# Altium PCB DS18B20_Industry_V2.PcbDoc
Units mm, origin at the board's own origin, x right, y up, seen from the top; angles counter-clockwise.
Board outline 151.25 x 83.25 mm, 2 copper layers (Top Layer, Bottom Layer); 77 components, 60 nets, 244 pads, 110 vias.
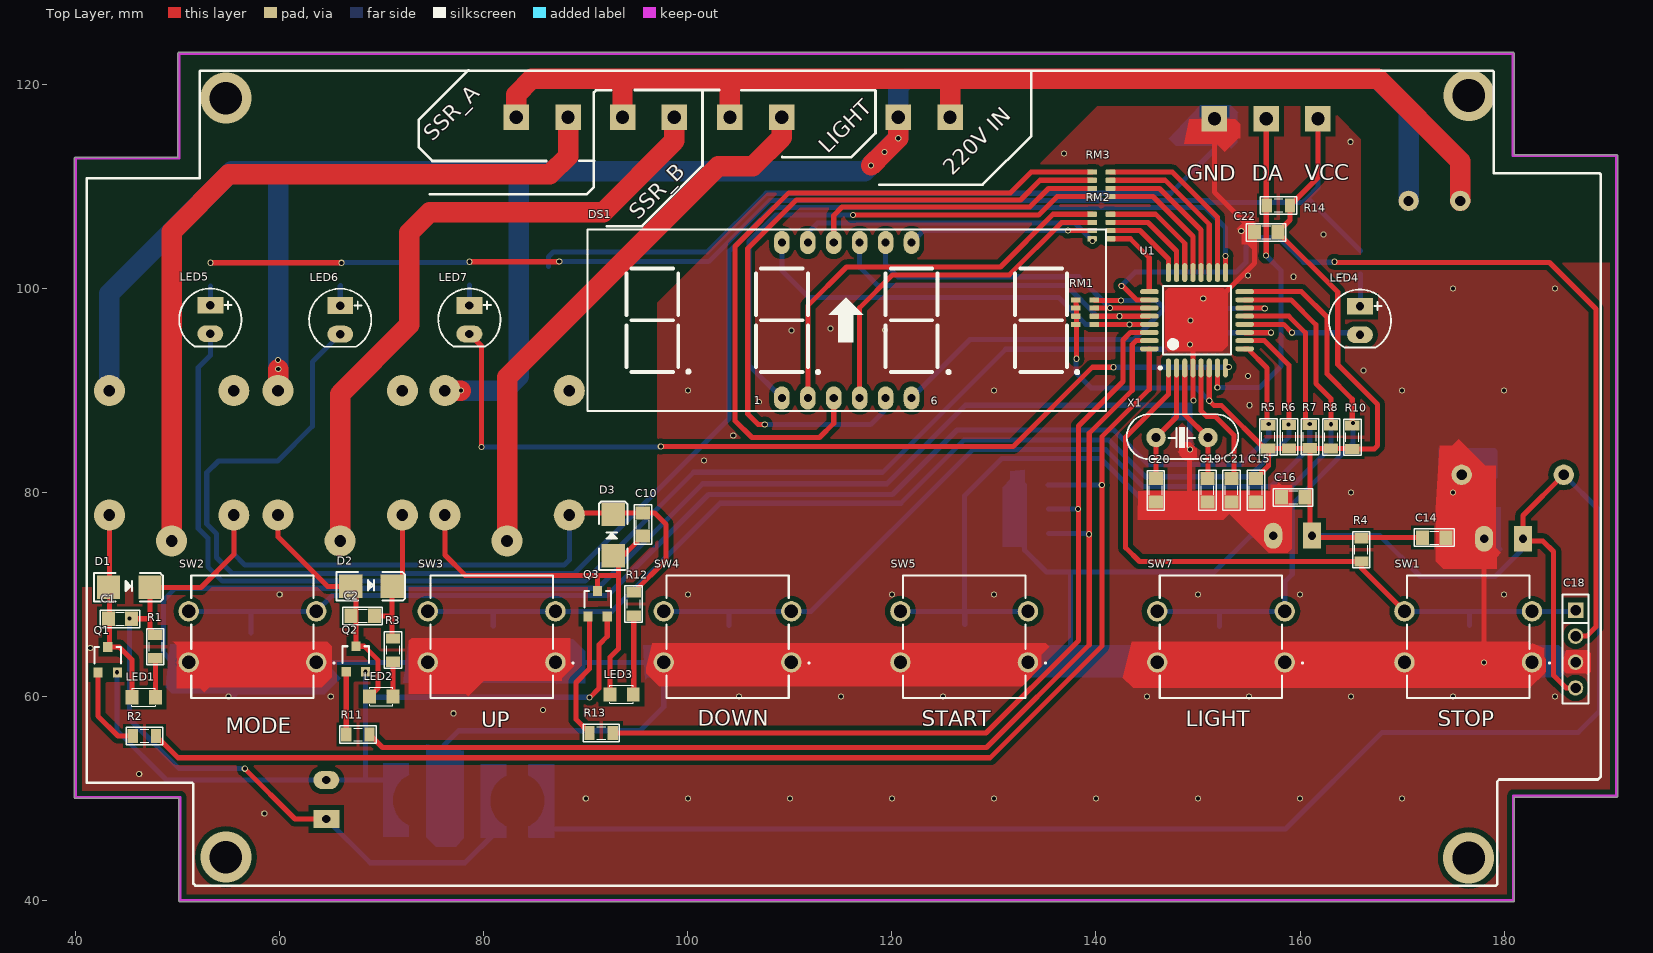
[diagram p0: Top Layer view]
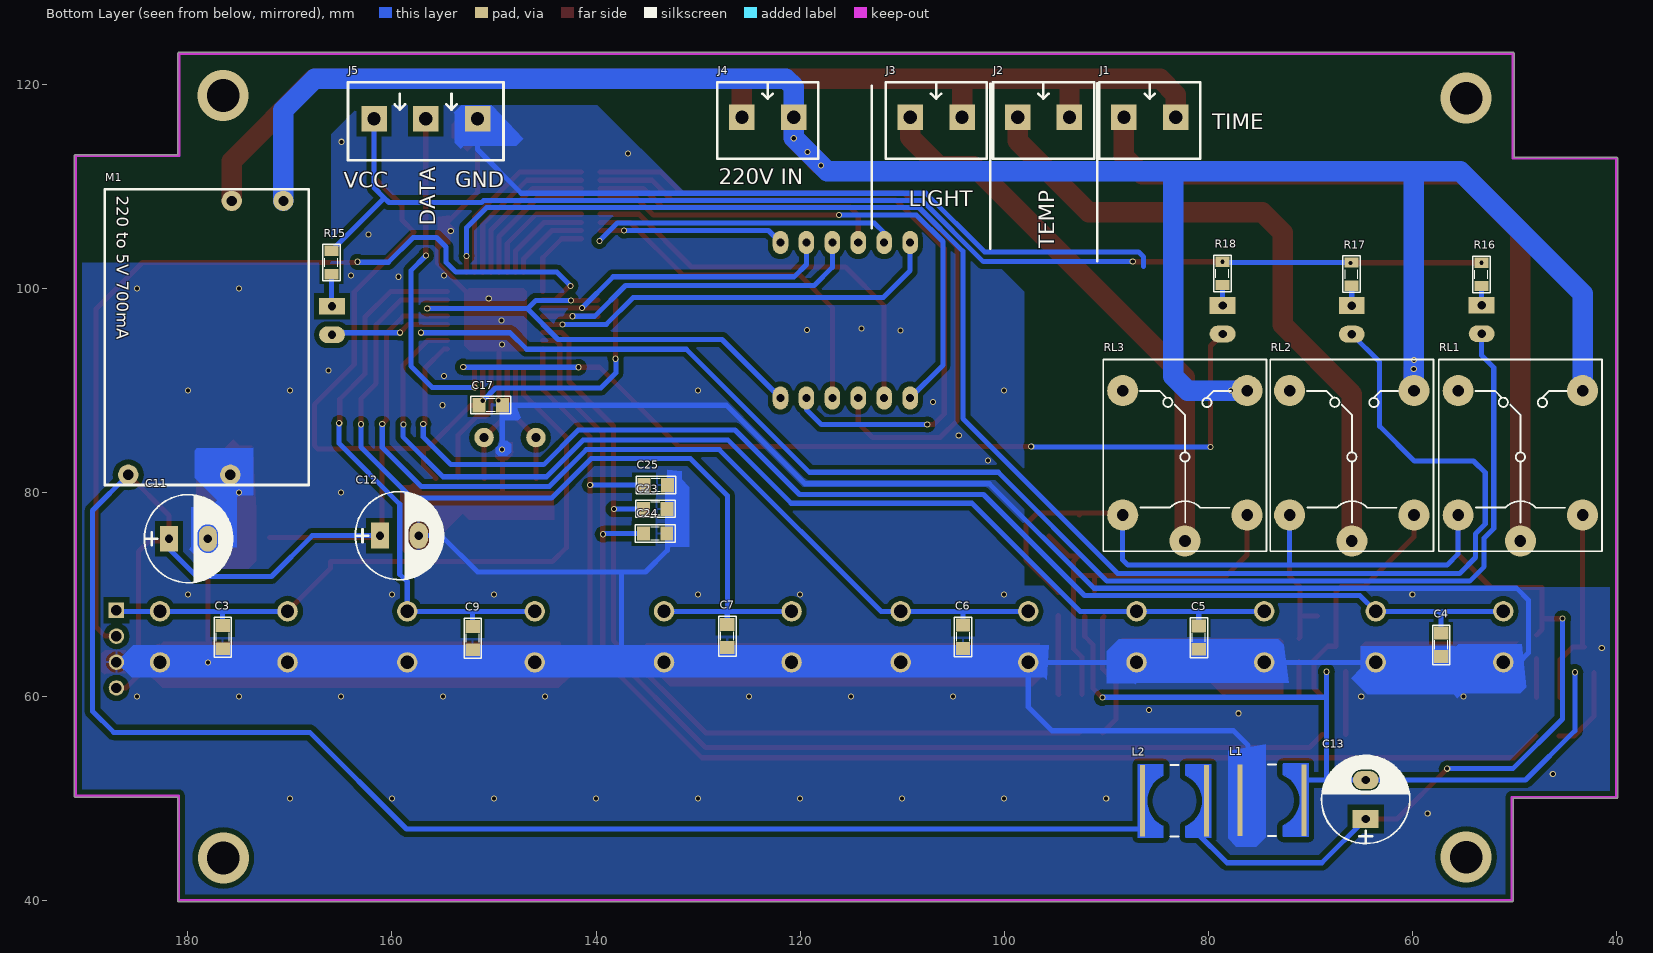
[diagram p1: Bottom Layer view, seen from below]

## Layer stack, top to bottom
Top Solder: solder mask 0.0102, Solder Resist, Dk 3.5
Top Layer: signal copper 0.0356
Dielectric 1: dielectric 0.32, FR-4, Dk 4.8
Bottom Layer: signal copper 0.0356
Bottom Solder: solder mask 0.0102, Solder Resist, Dk 3.5

## Board outline
50.105,40 50.105,50 40,50 cw(c40,50.127) 39.873,50.127 39.873,112.728 cw(c40,112.728) 40,112.855 50.02,112.855 50.02,123 cw(c50.147,123) 50.147,123.127 180.848,123.127 cw(c180.848,123) 180.975,123 cw(c180.848,123) 180.975,122.987 cw(c180.848,122.973) 180.975,122.973 180.975,113.1 190.975,113.1 cw(c190.975,112.973) 190.987,113.1 cw(c191,112.973) 191.127,112.973 191.127,50.242 cw(c191,50.242) 190.942,50.129 190.941,50.129 cw(c190.883,50.242) 190.883,50.115 181.01,50.115 181.01,40 cw(c180.883,40) 180.883,39.873 50.232,39.873 cw(c50.232,40)

## Design rules (kind name [scope] priority, off if disabled: settings)
Clearance [All] p1: gap=0.2 ignorepadtopadclearanceinfootprint=FALSE
PolygonConnect [All] p1: connectstyle=Relief reliefconductorwidth=0.254 reliefentries=4 polygonreliefangle="90 Angle" airgapwidth=0.254
RoutingVias [All] p1: holewidth=0.4 width=0.6 viastyle="Through Hole" minholewidth=0.4 minwidth=0.6 maxholewidth=0.4 maxwidth=0.6
SolderMaskExpansion [All] p1: expansion=0.102
Width [All] p1: maxlimit=2 minlimit=0.35 preferedwidth=0.5
30 further rules are at their usual default settings.

## Components (designator, comment, footprint, x,y, rotation, side; value= is the part's Value field where it differs from the comment)
C1 "104" SM-0805 44.35,67.62 r0 top value=103
C2 "104" SM-0805 68.13,67.9 r0 top value=103
C3 "104" SM-0805 176.59,65.82 r90 bottom value=103
C4 "104" SM-0805 57.17,65.06 r90 bottom value=103
C5 "104" SM-0805 80.93,65.77 r90 bottom value=103
C6 "104" SM-0805 104.03,65.84 r90 bottom value=103
C7 "104" SM-0805 127.14,65.92 r90 bottom value=103
C9 "104" SM-0805 152.09,65.72 r90 bottom value=103
C10 "104" SM-0805 95.59,76.85 r90 top value=103
C11 "1000uF/16V" CP1.5/3.4 181.85,75.46 r180 bottom
C12 "1000uF/16V" CP1.5/3.4 161.18,75.76 r180 bottom
C13 "1000uF/16V" CP1.5/3.4 64.57,48 r90 bottom
C14 "104" SM-0805 173.14,75.56 r180 top value=103
C15 "104" SM-0805 155.67,80.22 r90 top value=103
C16 "104" SM-0805 159.32,79.52 r0 top value=103
C17 "104" SM-0805 150.33,88.54 r0 bottom value=103
C18 "JP4" JP4-C1T 187,68.45 r270 top
C19 "22P" SM-0805 150.93,80.22 r90 top value=103
C20 "22P" SM-0805 145.85,80.2 r90 top value=103
C21 "104" SM-0805 153.28,80.22 r90 top value=103
C22 "104" SM-0805 156.677,105.5 r0 top value=103
C23 "104" SM-0805 134.19,78.38 r0 bottom value=103
C24 "104" SM-0805 134.21,75.96 r0 bottom value=103
C25 "104" SM-0805 134.15,80.71 r0 bottom value=103
D1 "Diode" DIO-SMD-106 45.25,70.69 r180 top
D2 "Diode" DIO-SMD-106 68.992,70.78 r180 top
D3 "Diode" DIO-SMD-106 92.68,75.812 r270 top
DS1 "7SEGQ" 7SEGQ 109.22,89.25 r0 top locked value="LED 7Q SEG"
J1 "KF2" KF2-5.08 85.72,116.762 r180 bottom
J2 "KF2" KF2-5.08 96.14,116.762 r180 bottom
J3 "KF2" KF2-5.08 106.66,116.762 r180 bottom
J4 "KF2" KF2-5.08 123.16,116.762 r180 bottom
J5 "KF3" KF3-5.08 151.61,116.61 r0 bottom
L1 "1.5uH" "BOURNS SRR6028" 73.75,49.83 r180 bottom
L2 "1.5uH" "BOURNS SRR6028" 83.3,49.77 r180 bottom
LED1 "LED" SM-LED-0805-Blue 47.81,59.91 r180 top
LED2 "LED" SM-LED-0805-Blue 71.1,60 r180 top
LED3 "LED" SM-LED-0805-Blue 94.65,60.2 r180 top
LED4 "LED" LED-5-BLUE 165.87,96.84 r270 top
LED5 "LED" LED-5-BLUE 53.2,96.937 r270 top
LED6 "LED" LED-5-BLUE 65.93,96.907 r270 top
LED7 "LED" LED-5-BLUE 78.59,96.927 r270 top
M1 "220-5VDC" "5V 700mA 3.5W AC DC" 188.14,109.72 r270 bottom
Q1 "2SC1815" SOT23-321 43.15,63.6 r0 top value=C1815
Q2 "2SC1815" SOT23-321 67.47,63.67 r0 top value=C1815
Q3 "2SC1815" SOT23-321 91.15,69.08 r0 top value=C1815
R1 "10k" RES-SMD-0805 47.81,64.88 r270 top
R2 "10k" RES-SMD-0805 46.747,56.13 r0 top
R3 "10k" RES-SMD-0805 71.11,64.55 r270 top
R4 "10k" RES-SMD-0805 166.01,74.37 r270 top
R5 "10k" RES-SMD-0805 156.89,85.44 r90 top
R6 "10k" RES-SMD-0805 158.92,85.45 r90 top
R7 "10k" RES-SMD-0805 160.96,85.463 r90 top
R8 "10k" RES-SMD-0805 163.04,85.43 r90 top
R10 "10k" RES-SMD-0805 165.12,85.4 r90 top
R11 "10k" RES-SMD-0805 67.67,56.27 r0 top
R12 "10k" RES-SMD-0805 94.7,69.06 r270 top
R13 "10k" RES-SMD-0805 91.507,56.42 r0 top
R14 "1k" RES-SMD-0805 157.88,108.12 r0 top
R15 "10k" RES-SMD-0805 165.93,102.53 r90 bottom
R16 "10k" RES-SMD-0805 53.22,101.36 r90 bottom
R17 "10k" RES-SMD-0805 65.96,101.39 r90 bottom
R18 "10k" RES-SMD-0805 78.61,101.46 r90 bottom
RL1 "Relay 10A/12V" RL_SPDT_10A 49.406,75.238 r90 bottom value="Relay SPDT, 10A, 12V"
RL2 "Relay 10A/12V" RL_SPDT_10A 65.924,75.24 r90 bottom value="Relay SPDT, 10A, 12V"
RL3 "Relay 10A/12V" RL_SPDT_10A 82.284,75.238 r90 bottom value="Relay SPDT, 10A, 12V"
RM1 "1k" RN4-0805 138.93,97.66 r180 top
RM2 "1k" RN4-0805 140.52,106.06 r180 top
RM3 "1k" RN4-0805 140.52,110.19 r180 top
SW1 "Tact Switch" SW4_12x12 182.83,72.063 r180 top value="Button chip 4 pin"
SW2 "Tact Switch" SW4_12x12 63.68,72.063 r180 top value="Button chip 4 pin"
SW3 "Tact Switch" SW4_12x12 87.12,72.063 r180 top value="Button chip 4 pin"
SW4 "Tact Switch" SW4_12x12 110.24,72.063 r180 top value="Button chip 4 pin"
SW5 "Tact Switch" SW4_12x12 133.43,72.063 r180 top value="Button chip 4 pin"
SW7 "Tact Switch" SW4_12x12 158.6,72.063 r180 top value="Button chip 4 pin"
U1 "STM8S003K3T6C" LQFP32T30 149.9,96.87 r90 top
X1 "12Mhz" XT2 148.43,85.37 r0 top value=4Mhz

## Footprints (in the part's own frame and the unit in brackets; to place one, negate y for a bottom-side part, rotate by r counter-clockwise, add the part's x,y. Pads: shape width x height; smd on the part's side, far side on the other; paste and mask are expansions set on the pad)
"5V 700mA 3.5W AC DC" [mm]
  round 2 hole 1: 1(1.15,17.5) 2(1.15,12.44) 3(28,2.3) 4(28,12.3)
  silkscreen extent 0,0 29,20
7SEGQ [mil] "DIP 12 Leads; Body 48 x 20 mm; Pitch 0.5 mm"
  oval 60x90 hole 31: 1(0,0) 2(100,0) 3(200,0) 4(300,0) 5(400,0) 6(500,0) 7(500,600) 8(400,600) 9(300,600) 10(200,600) 11(100,600) 12(0,600)
  silkscreen extent -750,-50 1250,650, body extent -720,-80 1260,668, height 565
"BOURNS SRR6028" [mm] "Precision Wire Wound Inductor, 2-Leads, Body 6.80x6.80mm, IPC Medium Density"
  rect 0.5x7 smd: 1(-3.15,0) 2(3.15,0)
  Top Layer region: 3.6,3.6 1.1,3.6 1.1,2.5 1.4,2.4 1.7,2.1 1.9,2 2.1,1.7 2.3,1.4 2.5,1 2.6,0.7 2.7,0.3 2.7,0 3.6,0
  Top Layer region: 3.6,-3.6 1.1,-3.6 1.1,-2.5 1.4,-2.4 1.7,-2.1 1.9,-2 2.1,-1.7 2.3,-1.4 2.5,-1 2.6,-0.7 2.7,-0.3 2.7,0 3.6,0
  Top Layer region: -3.6,-3.6 -1.1,-3.6 -1.1,-2.5 -1.4,-2.4 -1.7,-2.1 -1.9,-2 -2.1,-1.7 -2.3,-1.4 -2.5,-1 -2.6,-0.7 -2.7,-0.3 -2.7,0 -3.6,0
  Top Layer region: -3.6,3.6 -1.1,3.6 -1.1,2.5 -1.4,2.4 -1.7,2.1 -1.9,2 -2.1,1.7 -2.3,1.4 -2.5,1 -2.6,0.7 -2.7,0.3 -2.7,0 -3.6,0
  Top Layer lines w0.1: 1.1,-3.55 1.1,-2.5 ccw(c0,0) 2.731,0 ccw(c0,0) 1.1,2.5 1.1,3.55 ; -1.1,-3.55 -1.1,-2.5 cw(c0,0) -2.731,0 cw(c0,0) -1.1,2.5 -1.1,3.55
  silkscreen extent -0.4,-3.5 0.4,3.5, body extent -3.4,-3.4 3.4,3.4, height 2.8
CP1.5/3.4 [mil] "Tu hoa 220->470uF,16V, 470uF/16V,25V"
  rect 70x100 hole 32: 1(0,0)
  oval 70x100 hole 32: 2(150,0)
  silkscreen extent -95,-170 245,170, body extent -85,-157 230,157, height 446
DIO-SMD-106 [mil]
  rect 90x90.55 smd: 1(80,0) 2(-80,0)
  silkscreen extent -130,-55 135,55, body extent -99,-50 106,52, height 95
JP4-C1T [mm] "4 row, straight, gold plating"
  rect 1.52x1.52 hole 1.02: 1(0,0)
  round 1.52 hole 1.02: 2(2.54,0) 3(5.08,0) 4(7.62,0)
  silkscreen extent -1.52,-1.27 9.14,1.27, body extent -1.52,-1.25 9.14,1.25, height 8.51
KF2-5.08 [mm]
  rect 2.5x2.5 hole 1.3: 1(-2.54,0) 2(2.54,0)
  silkscreen extent -4.95,-4.08 4.95,3.43, body extent -5,-4.07 5,3.43, height 10
KF3-5.08 [mm]
  rect 2.5x2.5 hole 1.3: 1(0,0) 2(5.08,0) 3(10.147,0)
  silkscreen extent -2.54,-3.58 12.7,4.06, body extent -2.42,-3.51 12.58,3.99, height 10
LED-5-BLUE [mil] "LED 2 PIN, 5 ly , Only colour, pin to pin 110mil"
  rect 65x100 hole 32: 1(-55,0)
  oval 65x100 hole 32: 2(55,0)
  silkscreen extent -120,-120 104,120, body extent -113,-120 100,117, height 339
LQFP32T30 [mm] "32 7 x 7mm 0.8mm (31.5mil)"
  oval 1.85x0.5 smd: 1(-4.675,2.8) 2(-4.675,2) 3(-4.675,1.2) 4(-4.675,0.4) 5(-4.675,-0.4) 6(-4.675,-1.2) 7(-4.675,-2) 8(-4.675,-2.8) 17(4.675,-2.8) 18(4.675,-2) 19(4.675,-1.2) 20(4.675,-0.4) 21(4.675,0.4) 22(4.675,1.2) 23(4.675,2) 24(4.675,2.8)
  oval 0.5x1.85 smd: 9(-2.8,-4.675) 10(-2,-4.675) 11(-1.2,-4.675) 12(-0.4,-4.675) 13(0.4,-4.675) 14(1.2,-4.675) 15(2,-4.675) 16(2.8,-4.675) 25(2.8,4.675) 26(2,4.675) 27(1.2,4.675) 28(0.4,4.675) 29(-0.4,4.675) 30(-1.2,4.675) 31(-2,4.675) 32(-2.8,4.675)
  silkscreen extent -4.8,-3.35 3.35,3.72, body extent -3.5,-3.5 3.5,3.5, height 1.6
RES-SMD-0805 [mil]
  rect 39.37x55 smd: 1(-45,0) 2(45,0)
  silkscreen extent -70,-34 70,33, body extent -39,-25 39,25, height 31
RL_SPDT_10A [mil] "Relay SPDT, 5 pin, 10A,W 650mil, L 800mil, H 800mil"
  round 120 hole 45: 1(0,0) 2(580,240) 3(580,-240) 4(100,-240) 5(100,240)
  silkscreen extent -40,-315 700,315, body extent -46,-304 706,306, height 602
RN4-0805 [mm]
  round 0.254 on Mech15: 0(0,0)
  rrect25% 0.95x0.5 smd: 1(-0.9,1.2) 2(-0.9,0.4) 3(-0.9,-0.4) 4(-0.9,-1.2) 5(0.9,-1.2) 6(0.9,-0.4) 7(0.9,0.4) 8(0.9,1.2)
  Top Layer pour cut-out: -0.4,1.7 0.4,1.7 0.4,-1.7 -0.4,-1.7
  body extent -0.87,-1.68 0.88,1.67, height 0.7
SM-0805 [mil] "Compoment SMD 80x50mil"
  rect 50x55 smd: 1(-45,0) 2(45,0)
  silkscreen extent -77,-34 76,33, body extent -40,-25 40,25, height 24
SM-LED-0805-Blue [mil]
  rect 50x55 smd: 1(0,0) 2(90,0)
  silkscreen extent 0,-35 90,35, body extent 5,-25 85,25, height 43
SOT23-321 [mm]
  rect 0.9x0.95 smd mask+0: 1(0.95,-1.25)
  rect 0.9x0.95 smd: 2(0,1.25) 3(-0.95,-1.25)
  silkscreen extent -1.3,-0.38 1.3,1.25, body extent -1.52,-1.23 1.48,1.27, height 1.06
SW4_12x12 [mm]
  round 2 hole 1.3: 1(0.1,8.723) 2(0.1,3.723) 3(12.6,3.723) 4(12.6,8.723)
  silkscreen extent -1.68,0.22 12.35,12.22, body extent -0.51,0.22 13.46,12.22, height 4.3
XT2 [mil] "Footpin for Crystal 2 pin"
  round 75 hole 34: 1(-100,0) 2(100,0)
  silkscreen extent -213,-83 217,90, body extent -216,-87 216,90, height 144

## Part data
C1 C2 C3 C4 C5 C6 C7 C9 C10 C14 C15 C16 C17 C19 C20 C21 C22 C23 C24 C25: library part CM, "Cap SMD"
C11 C12 C13: library part CP4, "Cap 1000uF/16V - 220uF/50V", Description 1="2200uF-3300uF/6,3V - 1000uF-2200uF/10V", Description 2="1000uF/16V - 470uF => 1000uF/25V - 100uF/100V", Description 3=330uF>470uF/35V_220uF>470uF/50V_10uF>22uF/250V, Description 4="220uF => 330uF/63V - 10uF =>33uF/160 - 200V", Description 5="4,7uF>10uF/250V_3,3uF>10uF/400V - 2,2uF>4,7uF/450V"
C18: "WR-PHD 2.54 mm Angled Socket Header", Manufacturer="W¨¹rth Elektronik eiSos GmbH", partNo=613004143121, ComponentLink1 Description=Manufacturer, ComponentLink1URL=http://www.we-online.com, ComponentLink2 Description=Datasheet, ComponentLink2URL=http://katalog.we-online.de/em/datasheet/6130xx143121.pdf, Created by="Karrer Zheng", Created Date="29 March 2013", NoPins=04
DS1: library part LED7Q, "Four 7 Seg Dipslay"
J1 J2 J3 J4: Manufacturer="Würth Elektronik eiSos GmbH", partNo=691103110002, ComponentLink1 Description=Manufacturer, ComponentLink1URL=http://www.we-online.com, ComponentLink2 Description=Datasheet, ComponentLink2URL=http://katalog.we-online.de/em/datasheet/6911031100xx.pdf, Created by="Karrer Zheng", Created Date="29 October 2013", NoPins=2
J5: Manufacturer="Würth Elektronik eiSos GmbH", partNo=691103110003, ComponentLink1 Description=Manufacturer, ComponentLink1URL=http://www.we-online.com, ComponentLink2 Description=Datasheet, ComponentLink2URL=http://katalog.we-online.de/em/datasheet/6911031100xx.pdf, Created by="Karrer Zheng", Created Date="29 October 2013", NoPins=3
L1 L2: library part Inductor, "SMT Inductor"
M1: library part "5V 700mA 3.5W AC 220 to DC"
Q1 Q2 Q3: "NPN 600mW, ECB", =C2383
R1 R2 R3 R4 R5 R6 R7 R8 R10 R11 R12 R13 R14 R15 R16 R17 R18: library part R, "Resistor R1/4W"
RL1 RL2 RL3: library part "Relay 1", "Relay SPDT,10A - 12VDC 5 Pin", ="Relay SPDT, 10A, 24V"
RM1 RM2 RM3: library part ResPack
SW1 SW2 SW3 SW4 SW5 SW7: library part SW4
X1: library part XT2, "Crystal, 32.768 KHz, -40 to 85 degC, 3.2 x 1.5 x 0.9 mm SMD"

## Via types
v1: diameter 0.6, hole 0.4, Top Layer to Bottom Layer, 106 vias
v2: diameter 5, hole 3.2, Top Layer to Bottom Layer, 4 vias

## Nets (pads, with @x,y where several pads share a name; then routed paths per layer and width w, separated by ;. In a path a pad name is that pad's centre, name@x,y a point inside that pad or via, vN(x,y) a via of type N, cw(c..) or ccw(c..) an arc to the next point about the centre after c; other vN are vias at no path point)
220AC_L: J4.2 M1.1 RL1.3 RL2.3 RL3.3 | length 217.3
  Top Layer w2: RL2.3 59.86,90.004 v1(59.86,92.08) ; RL3.3 v1(77.75,89.97) v1@77.77,89.95 ; v1(117.95,112.04) v1(119.26,113.35) v1(120.62,114.71) J4.2
  Bottom Layer w2: RL1.3 43.31,99.46 55.32,111.47 117.35,111.47 120.62,114.74 J4.2 120.62,119.78 121.39,120.55 167.55,120.55 170.64,117.46 M1.1 ; RL2.3 59.86,90.004 v1(59.86,92.08) 59.86,111.24 59.828,111.272 ; RL3.3 v1(77.75,89.97) 82,89.97 83.42,91.39 83.42,111.31
  other v1: 59.828,92.98
220AC_N: J1.2 J2.2 J3.2 J4.1 M1.2 | length 114.2
  Top Layer w2: J1.2 83.18,118.98 84.72,120.52 93.11,120.52 ; J2.2 93.6,120.03 93.11,120.52 ; J3.2 104.12,120.31 104.33,120.52 ; J4.1 125.7,120.52 ; M1.2 175.7,112.46 167.64,120.52 125.7,120.52 ; 93.11,120.52 104.33,120.52 ; 104.33,120.52 125.7,120.52
a: RM2.1 U1.25 | length 7.9
  Top Layer w0.5: RM2.1 143.36,104.86 145.225,102.995 U1.25
b: RM2.2 U1.24 | length 8.2
  Top Layer w0.5: RM2.2 144.31,105.66 147.1,102.87 U1.24
c: RM2.3 U1.23 | length 9.7
  Top Layer w0.5: RM2.3 145.09,106.46 147.9,103.65 U1.23
d: RM2.4 U1.22 | length 11.3
  Top Layer w0.5: RM2.4 145.85,107.26 148.7,104.41 U1.22
DOWN: C6.2 R7.2 SW4.2 SW4.3 U1.13 | length 92.4
  Top Layer w0.5: U1.13 158.9,97.27 160.52,95.65 160.52,87.14 R7.2@160.96,86.7
  Bottom Layer w0.5: SW4.3 104.15,68.34 ; C6.2 104.03,68.22 104.15,68.34 ; v1(160.95,86.7) 160.95,84.4 157.12,80.57 144.58,80.57 140.96,84.19 127.92,84.19 112.07,68.34 SW4.2 104.15,68.34
DS18B20: J5.2 R14.1 U1.7 | length 33.9
  Top Layer w0.5: v1(151.89,90.28) 151.9,90.29 U1.7 ; v1@156.69,103.21 J5.2
  Bottom Layer w0.5: v1(151.89,90.28) 156.05,90.28 158.15,92.38 158.15,101.72 v1(156.66,103.21)
e: RM3.1 U1.21 | length 13.2
  Top Layer w0.5: RM3.1 145.59,108.99 149.5,105.08 U1.21
f: RM3.2 U1.20 | length 14.7
  Top Layer w0.5: RM3.2 146.23,109.79 150.3,105.72 U1.20
g: RM3.3 U1.19 | length 16.2
  Top Layer w0.5: RM3.3 146.78,110.59 151.1,106.27 U1.19
GND: C3.1 C4.1 C5.1 C6.1 C7.1 C9.1 C11.2 C12.2 C14.1 C15.1 C16.1 C17.1 C18.3 C19.1 C20.1 C21.1 C22.1 C23.1 C24.1 C25.1 J5.1 L1.1 M1.4 SW1.1 SW1.4 SW2.1 SW2.4 SW3.1 SW3.4 SW4.1 SW4.4 SW5.1 SW5.4 SW7.1 SW7.4 U1.4 | length 481.6
  Top Layer w0.35: v1@104.37,85.53 104.41,85.53 v1(104.45,85.57) ; v1@110.17,95.78 v1(110.17,95.86)
  Top Layer w0.5: C20.1 145.87,79.077 C19.1 C21.1 C15.1 157.734,79.077 C16.1 ; 149.18,79.1 149.18,84.18 v1(149.21,84.21) ; v1(149.54,89.01) 149.5,89.05 U1.4 149.5,96.43 155.534,102.464 C22.1 151.61,109.424 J5.1 ; C14.1 174.383,75.46 175.89,75.46 ; M1.4 175.89,81.67 175.89,75.46 ; v1(178.02,63.32) 178.04,63.34 C11.2 175.89,75.46
  Bottom Layer w0.35: v1@77.03,58.23 v1(77.03,58.35) ; v1@154.88,91.23 v1(154.88,91.4)
  Bottom Layer w0.5: 76.09,52.28 76.09,55.21 77.52,56.64 95.32,56.64 97.64,58.96 SW4.4 ; C5.1 80.93,63.35 80.92,63.34 ; 86.33,102.12 86.33,103.06 86.82,103.55 101.91,103.55 107.68,109.32 147.33,109.32 151.61,113.6 J5.1 ; C6.1 104.03,63.35 104.04,63.34 ; C7.1 127.14,63.47 127.01,63.34 ; C25.1 133.007,74.333 135.15,72.19 137.49,72.19 ; v1@149.187,84.21 C17.1 127.21,88.54 119.52,80.85 101.45,80.85 91.2,70.6 49.77,70.6 48.6,69.43 48.6,64.28 49.54,63.34 SW2.4 SW2.1 SW3.4 80.92,63.34 ; C9.1 152.09,63.36 152.07,63.34 ; C12.2 155.16,75.76 151.59,72.19 137.49,72.19 ; C3.1 176.59,63.4 176.65,63.34 ; C18.3 186.97,63.34 SW1.1 176.65,63.34 ; 80.92,63.34 SW3.1 SW4.4 ; SW4.4 104.04,63.34 ; 104.04,63.34 SW4.1 SW5.4 127.01,63.34 ; 127.01,63.34 SW5.1 137.49,63.34 ; 137.49,63.34 SW7.4 152.07,63.34 ; 137.49,63.34 137.49,72.19 ; 152.07,63.34 SW1.4 176.65,63.34
  other v1: 58.49,48.52 90,50 100,50 110,50 120,50 130,50 140,50 150,50 160,50 170,50 46.23,52.39 85.79,58.68 55,60 65,60 105,60 115,60 125,60 145,60 155,60 165,60 175,60 185,60 41.43,64.76 60,70 100,70 120,70 130,70 150,70 160,70 180,70 165,80 175,80 101.6,83.12 155.05,88.54 106.96,88.86 100,90 130,90 170,90 180,90 166.21,91.95 149.23,94.5 119.33,95.9 113.98,96.07 149.27,96.83 150.51,99 175,100 185,100 159.35,101.13 154.9,101.24 164.03,101.27 162.31,105.28 154.24,105.61 136.87,113.21 164.95,114.36
GND_RELAY: C13.2 L1.2 Q1.1 Q2.1 Q3.1 | length 76.1
  Top Layer w0.5: v1(44.07,62.37) 44.09,62.35 Q1.1 ; v1(90.38,59.88) 91.279,60.779 91.279,61.085 91.31,61.116 91.31,65.1 92.1,65.89 Q3.1
  Bottom Layer w0.5: v1@44.08,62.36 v1(44.07,62.37) 44.07,56.63 48.9,51.8 61.5,51.8 68.37,51.8 ; v1(68.42,62.42) 68.42,59.75 ; 71.04,51.89 70.95,51.8 68.37,51.8 ; v1@90.38,59.92 68.59,59.92 68.42,59.75 ; 68.37,51.8 68.42,51.85 68.42,59.75
h: RM3.4 U1.18 | length 17.7
  Top Layer w0.5: RM3.4 147.48,111.39 151.9,106.97 U1.18
LED1: DS1.12 RM1.1 U1.29 | length 44.4
  Top Layer w0.5: RM1.1 139.84,96.47 v1(143.28,96.47) U1.29
  Bottom Layer w0.5: DS1.12 109.22,101.73 111.85,99.1 136.36,99.1 138.99,96.47 v1(143.28,96.47)
LED2: DS1.9 RM1.2 U1.28 | length 35.3
  Top Layer w0.5: RM1.2 v1(142.32,97.26) 145.215,97.26 U1.28
  Bottom Layer w0.5: DS1.9 116.84,102.06 118.62,100.28 137.11,100.28 140.13,97.26 v1(142.32,97.26)
LED3: DS1.8 RM1.3 U1.27 | length 31.3
  Top Layer w0.5: RM1.3 139.84,98.07 v1(141.37,98.07) U1.27
  Bottom Layer w0.5: DS1.8 119.38,102.33 120.58,101.13 138.31,101.13 v1(141.37,98.07)
LED4: DS1.6 RM1.4 U1.14 | length 47.4
  Top Layer w0.5: RM1.4 139.84,98.87 139.89,98.82 v1(142.46,98.82) ; U1.14 156.51,98.07 v1(156.54,98.04)
  Bottom Layer w0.5: DS1.6 127.66,94.99 143.72,94.99 146.72,97.99 145.89,98.82 v1(142.46,98.82) ; 146.77,98.04 v1(156.54,98.04)
LIGHT: C9.2 R10.2 SW7.2 SW7.3 U1.16 | length 55.8
  Top Layer w0.5: U1.16 160.14,99.67 162.63,97.18 162.63,91.62 165.12,89.13 R10.2@165.12,86.78
  Bottom Layer w0.5: SW7.3 151.93,68.34 ; C9.2 152.09,68.18 151.93,68.34 ; v1(165.17,86.78) 165.17,84.78 159.23,78.84 159.23,71.98 158.5,71.25 SW7.2 151.93,68.34
MODE: C4.2 R5.2 SW2.2 SW2.3 U1.9 | length 127.6
  Top Layer w0.5: U1.9 154.88,94.07 156.77,92.18 R5.2@156.77,86.703
  Bottom Layer w0.5: SW2.3 57.3,68.34 ; C4.2 57.17,68.21 57.3,68.34 ; v1(156.93,86.69) 156.93,85.44 154.21,82.72 145.13,82.72 141.74,86.11 126.37,86.11 120.06,79.8 102.03,79.8 92.13,69.9 65.14,69.9 SW2.2 57.3,68.34
NetC1_1: C1.1 D1.1 LED1.2 Q1.2 RL1.4 | length 19.6
  Top Layer w0.5: RL1.4 43.31,65.01 Q1.2 44.28,64.85 45.524,63.606 LED1.2
NetC2_1: C2.1 D2.1 LED2.2 Q2.2 RL2.4 | length 24
  Top Layer w0.5: RL2.4 59.828,75.652 64.7,70.78 D2.1 67.47,70.27 Q2.2 68.28,64.92 69.65,63.55 69.65,60.836 LED2.2
NetC10_1: C10.1 D3.1 LED3.2 Q3.2 RL3.4 | length 41.2
  Top Layer w0.5: RL3.4 76.188,73.862 78.18,71.87 91.14,71.87 ; Q3.2 91.15,71.86 91.14,71.87 ; LED3.2 92.364,63.844 93.2,64.68 93.2,71.86 ; C10.1 93.663,73.78 D3.1 93.2,73.26 93.2,71.86 ; 91.14,71.87 93.19,71.87 93.2,71.86
NetC19_2: C19.2 U1.3 X1.2 | length 11.8
  Top Layer w0.5: U1.3 148.7,87.64 X1.2 150.97,81.403 C19.2
NetC20_2: C20.2 U1.2 X1.1 | length 11.7
  Top Layer w0.5: C20.2 145.89,81.383 X1.1 147.9,87.38 U1.2
NetC21_2: C21.2 U1.5 | length 12.5
  Top Layer w0.5: U1.5 150.3,88 150.84,87.46 151.67,87.46 153.52,85.61 C21.2@153.52,81.496
NetDS1_1: DS1.1 RM3.8 | length 52.1
  Top Layer w0.5: v1(116.18,107.17) 134.378,107.17 136.198,108.99 RM3.8
  Bottom Layer w0.5: DS1.1 106,92.47 106,104.59 108.58,107.17 v1(116.18,107.17)
NetDS1_2: DS1.2 RM2.5 | length 40.6
  Top Layer w0.5: DS1.2 111.76,98.3 115.56,102.1 130.63,102.1 135.79,107.26 RM2.5
NetDS1_3: DS1.3 RM3.5 | length 68.5
  Top Layer w0.5: DS1.3 114.3,86.77 112.9,85.37 106.28,85.37 104.63,87.02 104.63,104.09 109.9,109.36 131.62,109.36 133.65,111.39 RM3.5
NetDS1_4: DS1.4 RM2.6 | length 35.1
  Top Layer w0.5: DS1.4 116.84,98.1 120.06,101.32 131.5,101.32 136.64,106.46 RM2.6
NetDS1_5: DS1.5 RM3.6 | length 68.4
  Top Layer w0.5: v1(107.54,86.65) 106.9,86.65 105.87,87.68 105.87,103.9 110.63,108.66 132.59,108.66 134.52,110.59 RM3.6
  Bottom Layer w0.5: v1(107.54,86.65) 117.92,86.65 119.38,88.11 DS1.5
NetDS1_7: DS1.7 RM2.7 | length 18.2
  Top Layer w0.5: v1(137.24,105.66) RM2.7
  Bottom Layer w0.5: DS1.7 123.09,105.66 v1(137.24,105.66)
NetDS1_10: DS1.10 RM3.7 | length 29.1
  Top Layer w0.5: DS1.10 114.3,107.14 115.12,107.96 133.51,107.96 135.34,109.79 RM3.7
NetDS1_11: DS1.11 RM2.8 | length 30
  Bottom Layer w0.5: DS1.11 111.76,105.44 112.73,106.41 137.91,106.41 v1(139.67,104.65)
NetJ1_1: J1.1 RL1.1 | length 76
  Top Layer w2: RL1.1 49.406,105.556 55.02,111.17 86.48,111.17 88.26,112.95 J1.1
NetJ2_1: J2.1 RL2.1 | length 65
  Top Layer w2: RL2.1 65.924,89.646 72.71,96.432 72.71,105.44 74.72,107.45 91.69,107.45 98.68,114.44 J2.1
NetJ3_1: J3.1 RL3.1 | length 54.7
  Top Layer w2: RL3.1 82.284,91.264 102.97,111.95 106.37,111.95 109.2,114.78 J3.1
NetLED1_1: LED1.1 R1.2 | length 3.8
  Top Layer w0.5: LED1.1 R1.2
NetLED2_1: LED2.1 R3.2 | length 3.4
  Top Layer w0.5: LED2.1 71.1,63.397 R3.2
NetLED3_1: LED3.1 R12.2 | length 7.7
  Top Layer w0.5: LED3.1 94.7,60.25 R12.2
NetLED4_1: LED4.1 R15.1 | length 3.2
  Bottom Layer w0.5: LED4.1 165.93,98.297 R15.1
NetLED4_2: LED4.2 U1.12 | length 11.7
  Top Layer w0.5: U1.12 158.39,96.47 v1(159.21,95.65)
  Bottom Layer w0.5: v1(159.21,95.65) 165.643,95.65 165.653,95.66 LED4.2
NetLED5_1: LED5.1 R16.1 | length 1.9
  Bottom Layer w0.5: LED5.1 53.22,98.354 R16.1
NetLED5_2: LED5.2 U1.11 | length 141.2
  Top Layer w0.5: U1.11 154.595,95.65 v1(157.17,95.65)
  Bottom Layer w0.5: LED5.2 53.2,93.41 52.02,92.23 52.02,76.46 52.96,75.52 52.96,72.72 54.38,71.3 89.91,71.3 100.58,81.97 119.09,81.97 131.15,94.03 146.8,94.03 148.42,95.65 v1(157.17,95.65)
NetLED6_1: LED6.1 R17.1 | length 2
  Bottom Layer w0.5: LED6.1 65.93,100.217 R17.1
NetLED6_2: LED6.2 U1.17 | length 160.3
  Top Layer w0.5: v1(152.69,103.17) 152.69,101.555 U1.17
  Bottom Layer w0.5: LED6.2 63.2,92.78 63.2,86.48 59.8,83.08 53.99,83.08 52.85,81.94 52.85,76.9 53.81,75.94 53.81,73.61 55.36,72.06 88.87,72.06 104.05,87.24 104.05,103.63 108.34,107.92 150.71,107.92 152.69,105.94 v1(152.69,103.17)
NetLED7_1: LED7.1 R18.1 | length 2
  Bottom Layer w0.5: LED7.1 78.61,98.344 R18.1
NetLED7_2: LED7.2 U1.8 | length 88.1
  Top Layer w0.5: LED7.2 79.77,94.35 v1(79.77,84.44) ; v1(97.35,84.5) 131.88,84.5 139.64,92.26 v1(141.72,92.26)
  Bottom Layer w0.5: v1(79.77,84.44) 97.25,84.44 97.33,84.52 v1(97.35,84.5) ; v1(141.72,92.26) 152.97,92.26 v1(153.01,92.3)
NetQ1_3: Q1.3 R2.1 | length 8.5
  Top Layer w0.5: Q1.3 42.2,58.07 44.14,56.13 R2.1
NetQ2_3: Q2.3 R11.1 | length 6.2
  Top Layer w0.5: Q2.3 66.52,56.277 R11.1
NetQ3_3: Q3.3 R13.1 | length 12.6
  Top Layer w0.5: Q3.3 90.364,67.666 90.364,62.714 89.03,61.38 89.03,57.754 R13.1
RELAY_LIGHT: C23.2 R13.2 U1.30 | length 86.5
  Top Layer w0.5: R13.2 129.23,56.42 138.28,65.47 138.28,86.5 142.64,90.86 142.64,94.94 143.37,95.67 U1.30
  Bottom Layer w0.5: C23.2 v1(138.25,78.38)
RELAY_SSR_A: C25.2 R2.2 U1.32 | length 134.4
  Top Layer w0.5: R2.2 50.03,53.99 129.63,53.99 140.57,64.93 v1(140.57,80.71) 140.57,85.45 145.22,90.1 145.22,94.065 U1.32
  Bottom Layer w0.5: C25.2 v1(140.57,80.71)
RELAY_SSR_B: C24.2 R11.2 U1.31 | length 112.2
  Top Layer w0.5: R11.2 70.083,55 129.28,55 139.34,65.06 139.34,85.8 143.55,90.01 143.55,94.5 143.92,94.87 U1.31
  Bottom Layer w0.5: C24.2 139.24,75.96 v1(139.3,75.9)
RESET: C3.2 C18.1 R4.2 SW1.2 SW1.3 U1.1 | length 67.9
  Top Layer w0.5: U1.1 147.1,89.62 142.91,85.43 142.91,74.57 144.253,73.227 R4.2 166.01,72.56 SW1.3
  Bottom Layer w0.5: SW1.3 176.72,68.34 ; C3.2 176.59,68.21 176.72,68.34 ; C18.1 186.89,68.34 SW1.2 176.72,68.34
START: C7.2 R8.2 SW5.2 SW5.3 U1.15 | length 86.8
  Top Layer w0.5: U1.15 159.11,98.87 161.55,96.43 161.55,90.67 163.04,89.18 v1(163.04,86.68)
  Bottom Layer w0.5: SW5.3 127.13,68.34 ; C7.2 127.14,68.33 127.13,68.34 ; SW5.2 127.13,68.34 ; v1(163.04,86.68) 163.04,84.43 158.05,79.44 144.35,79.44 140.47,83.32 130.76,83.32 127.13,79.69 127.13,68.34
SWIM: C18.2 U1.26 | length 89.2
  Top Layer w0.5: v1@142.43,100.26 v1@142.48,100.26 ; v1(142.5,100.24) v1@142.48,100.26 ; U1.26 143.98,98.87 142.59,100.26 v1@142.48,100.26 ; v1(163.38,102.6) 163.44,102.54 184.45,102.54 189.01,97.98 189.01,66.83 188.09,65.91 C18.2
  Bottom Layer w0.5: v1(142.5,100.24) 143.85,101.59 153.74,101.59 154.7,102.55 154.7,104.05 155.63,104.98 157.92,104.98 160.35,102.55 v1@163.38,102.55
UP: C5.2 R6.2 SW3.2 SW3.3 U1.10 | length 108.4
  Top Layer w0.5: U1.10 156.52,94.87 158.92,92.47 R6.2@158.92,86.67
  Bottom Layer w0.5: SW3.3 80.97,68.34 ; C5.2 80.93,68.3 80.97,68.34 ; v1(158.87,86.67) 158.9,86.67 158.93,86.7 158.93,85.46 155,81.53 144.86,81.53 141.27,85.12 127.05,85.12 120.87,78.94 103.16,78.94 92.56,68.34 SW3.2 80.97,68.34
VCC: C11.1 C12.1 C14.2 C15.2 C16.2 C17.2 C18.4 C22.2 J5.3 L2.1 M1.3 R4.1 R5.1 R6.1 R7.1 R8.1 R10.1 R14.2 R15.2 R16.2 R17.2 R18.2 RM1.5 RM1.6 RM1.7 RM1.8 U1.6 | length 413.1
  Top Layer w0.5: v1(53.22,102.503) 66.047,102.503 v1(66.05,102.5) ; v1(78.61,102.603) 87.393,102.603 v1(87.4,102.61) ; RM1.5 138.03,98.41 138.08,98.36 138.08,97.26 v1(138.08,93.1) ; U1.6 v1(151.1,88.98) 151.58,88.5 152.32,88.5 156.523,84.297 R5.1 ; C15.2 156.89,82.583 R5.1 ; R7.1 R7.1@160.96,84.297 ; J5.3 161.757,110.854 R14.2 159.023,106.703 C22.2 163.69,99.63 163.69,92.53 167.59,88.63 167.59,84.577 167.27,84.257 R10.1 165.08,84.297 R7.1@160.96,84.297 ; C14.2 161.38,75.56 C12.1 160.96,75.98 R7.1@160.96,84.297 ; M1.3 181.85,77.73 C11.1 182.09,75.22 183.82,75.22 184.83,74.21 184.83,62.08 186.08,60.83 C18.4 ; R5.1 R7.1@160.96,84.297
  Bottom Layer w0.5: R17.2@66.05,102.533 R18.2@78.507,102.533 ; 85.82,47 158.58,47 168.06,56.48 187.27,56.48 189.34,58.55 189.34,78.22 M1.3 ; v1(87.4,102.61) 102.04,102.61 108.05,108.62 151,108.62 151.22,108.4 160.283,108.4 160.743,108.86 ; v1(138.08,93.1) 138.05,93.07 138.05,91.72 139.53,90.24 149.84,90.24 v1(151.1,88.98) ; C12.1 167.81,75.76 171.81,71.76 179.13,71.76 181.85,74.48 C11.1 ; J5.3 161.757,109.874 160.743,108.86 ; R15.2 160.743,108.86
VCC_RELAY: C1.2 C2.2 C10.2 C13.1 D1.2 D2.2 D3.2 L2.2 R1.1 R3.1 R12.1 RL1.5 RL2.5 RL3.5 | length 152.1
  Top Layer w0.5: C1.2 47.152,67.62 47.282,67.49 ; R1.1 47.282,66.551 47.282,67.49 ; RL1.5 55.502,73.902 52.29,70.69 D1.2 47.282,67.49 ; v1(56.58,52.92) 61.5,48 C13.1 ; C2.2 70.984,67.9 71.024,67.86 ; R3.1 71.024,65.779 71.024,67.86 ; RL2.5 72.02,71.776 D2.2 71.024,67.86 ; RL3.5 88.595,77.993 C10.2 96.737,77.993 97.86,76.87 97.86,73.363 R12.1 ; D3.2@92.614,77.778 D3.2
  Bottom Layer w0.5: v1(45.27,67.63) 45.27,57.8 50.15,52.92 v1(56.58,52.92) ; RL1.5 55.502,73.978 56.61,72.87 72.02,72.87 ; C13.1 68.87,43.7 78.17,43.7 81.19,46.72 ; RL2.5 72.02,72.87 ; RL3.5 88.39,77.768 88.39,73.4 87.86,72.87 72.02,72.87
pads on no net: RL1.2 RL2.2 RL3.2 RM1.0 RM2.0 RM3.0
copper on no net:
  other v2: 176.53,44.17 54.724,44.25 54.724,118.63 176.54,118.89

## Polygon pours and split planes (outlines as drawn)
GND on Top Layer (solid, pour order 6): 50.232,40 50.232,50.127 40,50.127 40,70.69 92.39,70.69 96.98,75.28 96.98,98.59 107.74,109.35 131.62,109.35 140.11,117.84 162.73,117.84 165.95,114.62 165.95,102.503 190.983,102.503 191,102.52 191,50.242 180.883,50.242 180.883,40
GND on Bottom Layer (solid, pour order 8): 40.01,70.71 40.01,50.137 40,50.127 50.232,50.127 50.232,40 180.883,40 180.883,50.242 191,50.242 191,102.49 190.987,102.503 166.067,102.503 165.95,102.62 165.95,115.08 163.07,117.96 139.88,117.96 131.24,109.32 107.68,109.32 98.01,99.65 98.01,70.83

## Keep-outs
Keep-Out Layer:
  lines w0.254: 180.848,122.973 180.848,112.973 190.975,112.973 ; 180.848,123 50.147,123 50.147,112.728 40,112.728 40,50.127 50.232,50.127 50.232,40 180.883,40 180.883,50.242 190.883,50.242 ; 191,50.242 191,112.973

## Other copper
Top Layer:
  region net GND: 149.13,116.55 153.65,116.55 154.12,116.08 154.12,114.69 153.958,114.69 152.628,113.36 151.818,114.17 148.66,114.17
  region net GND: 155.47,107.01 155.5,106.98 155.5,104.079 155.29,103.869 154.849,104.31 154.3,104.31 154.3,105.35 153.81,105.84 154.33,106.36 154.33,107.17
  region net GND: 182.74,65.2 182.74,63.604 182.603,63.467 182.71,63.36 183.89,63.36 183.89,64.71 183.92,64.74
  region net GND: 186.07,64.55 188.15,64.55 188.47,64.23 188.47,62.438 188.15,62.118 188.008,62.26 186.1,62.26 185.76,62.6 185.76,63.47
  region net GND: 173.32,78.38 173.32,73.25 174.04,72.53 179.27,72.53 179.27,73.64 179.69,74.06 179.2,74.55 179.2,82.63 178.14,82.63 175.57,85.2 174.92,84.55 173.67,84.55
  region net GND: 144.16,80.1 146.7,80.1 146.75,80.15 146.79,80.11 156.98,80.11 156.99,80.1 157.107,80.217 157.107,80.76 157.74,80.76 157.93,80.95 158.19,80.69 159.19,80.69 159.19,74.481 158.769,74.06 156.92,74.06 153.06,77.92 152.47,77.33 144.1,77.33
  region net GND: 149.2,84.94 149.878,84.262 149.878,83.512 149.91,83.48 149.59,83.16 148.7,83.16 148.25,83.61 148.21,83.61 148.21,83.79 148.03,83.97 148.14,84.08 148.14,84.93
  region net GND: 143.51,65.34 182.425,65.34 184.074,63.691 184.074,62.374 182.53,60.83 143.66,60.83 142.64,61.85
  region net GND: 96.53,65.22 135.07,65.22 135.42,64.87 134.644,64.094 134.644,62.904 132.76,61.02 97.18,61.02 95.91,62.29 95.91,62.88
  region net GND: 72.92,65.71 72.67,65.46 72.67,60.26 78.24,60.26 78.49,60.01 80.02,61.54 87.62,61.54 87.62,61.783 88.85,63.013 88.48,63.383 88.48,65.71
  region net GND: 49.51,65.39 49.9,65 49.9,60.79 52.21,60.79 52.6,60.4 53.08,60.88 64.11,60.88 65.11,61.88 65.11,64.93 64.68,65.36
  region net GND: 152.89,99.64 152.89,94.375 152.365,93.85 147.09,93.85 146.77,94.17 146.77,99.71 147.09,100.03 152.49,100.03 152.87,99.65
Bottom Layer:
  region net GND: 150.17,117.91 150.22,117.96 153.21,117.96 153.94,117.23 153.84,117.13 153.84,114.26 153.25,113.67 152.96,113.96 147.82,113.96 147.14,114.64
  region net GND: 147.93,88.69 148.08,88.54 149.187,88.54 149.187,87.393 149.21,87.37 148.91,87.07 147.64,87.07 147.39,87.32
  region net GND: 149.562,84.641 149.81,84.393 149.81,83.82 149.59,83.6 148.68,83.6 148.33,83.95 148.33,84.705 148.685,85.06 149.287,85.06 149.337,85.11
  region net GND: 149.555,84.991
  region net GND: 149.665,84.725
  region net GND: 173.58,84.376 173.61,84.346 173.61,79.74 175,79.74 175.68,79.06 177.62,81 178.1,81 178.1,83.99 178.07,84.02
  region net GND: 173.79,84.376 175.23,82.936 175.23,74.63 175.85,74.63 176.95,73.53 178.94,73.53 179.86,74.45 179.65,74.66 179.65,78.52 177.83,78.52 177.14,79.21 179.35,81.42 179.35,84.08 179.11,84.32
  region net GND: 95.64,65 185.37,65 187,63.37 185.5,61.87 96.08,61.87 95.83,61.62
  region net GND: 74.38,55.31 74.38,46.19 75.28,45.29 77.3,45.29 77.3,45.32 78.06,46.08 78.06,54.7
  region net GND: 72.58,65.07 73.12,65.61 88.77,65.61 89.96,64.42 89.96,61.29 87.25,61.29 87.15,61.19 86.99,61.35 72.1,61.35
  region net GND: 49.27,65.13 55.48,65.13 55.75,64.86 55.8,64.91 65.03,64.91 65.03,62.75 66,61.78 64.43,60.21 55.96,60.21 55.59,59.84 55.11,60.32 49.44,60.32 48.84,60.92
  region net GND: 133.03,82.22 133.03,74.356 133.007,74.333 132.69,74.65 130.85,74.65 130.85,80.52 131.61,81.28 131.61,82.06

## Silkscreen, mask and mechanical layers (free items; w line width, h text height)
Top Overlay:
  lines w0.254: 74.73,109.23 90.1,109.23 90.79,109.92 90.79,119.13 90.79,119.2 91,119.41 92.49,119.41 ; 78.54,121.35 78.46,121.35 73.62,116.51 73.62,113.83 74.97,112.48 86.12,112.48 ; 89.37,112.5 90.81,112.5 ; 92.05,106.1 95.51,106.1 101.44,112.03 101.44,118.62 101.44,119.16 ; 94.8,119.44 101.72,119.44 103.08,119.44 ; 101.44,118.89 101.44,119.37 ; 105.23,119.41 118.34,119.41 118.39,119.36 118.39,115.21 116.01,112.83 109.28,112.83 109.24,112.87 ; 118.76,110.16 128.89,110.16 133.66,114.93 133.66,121.32 ; 41.07,51.58 41.12,51.53 51.41,51.53 51.54,51.4 51.54,41.67 51.75,41.46 179.19,41.46 179.32,41.59 179.32,51.64 179.54,51.86 189.2,51.86 189.46,52.12 189.46,111.15 189.33,111.28 179.01,111.28 178.97,111.32 178.97,121.24 178.87,121.34 52.26,121.34 52.18,121.26 52.18,110.79 41.07,110.79 41.07,51.58
  text "SSR_A" at 75.02,114.32 h1.52 r45
  text "LIGHT" at 113.7,113.13 h1.52 r45
  text "220V IN" at 125.91,110.96 h1.52 r45
  text "VCC" at 160.48,110.59 h1.52
  text "GND" at 148.89,110.56 h1.52
  text "DA" at 155.28,110.56 h1.52
  text "SSR_B" at 95.16,106.62 h1.52 r45
  text "DOWN" at 100.97,57.14 h1.52
  text "START" at 122.93,57.08 h1.52
  text "LIGHT" at 148.82,57.08 h1.52
  text "STOP" at 173.49,57.08 h1.52
  text "UP" at 79.77,56.98 h1.52
  text "MODE" at 54.69,56.4 h1.52
Bottom Overlay:
  lines w0.254: 90.86,102.66 90.86,120.1 ; 101.37,103.88 101.37,120.05 ; 112.96,105.9 112.96,119.85
  text "TIME" at 79.63,115.6 h1.52
  text "220V IN" at 127.96,110.2 h1.52
  text "GND" at 153.79,109.9 h1.52
  text "VCC" at 164.71,109.88 h1.52
  text "LIGHT" at 109.34,108.03 h1.52
  text "DATA" at 155.76,106.11 h1.52 r270
  text "TEMP" at 95.08,103.91 h1.52 r270
Top Solder:
  lines w1.5: 49.44,75 49.44,105.65 54.97,111.18 86.47,111.18 88.26,112.97 88.26,116.762 ; 65.924,75.24 65.924,89.714 72.69,96.48 72.69,105.49 74.68,107.48 91.81,107.48 98.68,114.35 98.68,116.762 ; 82.24,75.6 82.24,91.27 102.96,111.99 106.48,111.99 109.28,114.79 109.28,116.97 ; 83.18,116.762 83.18,118.93 84.76,120.51 125.43,120.51 125.7,120.24 125.7,116.762 ; 93.6,116.762 93.6,120.47 ; 104.12,116.762 104.12,120.47
Bottom Solder:
  region: 119.89,116.23
  region: 120.62,116.762
  region: 84.32,53.1
  lines w1.5: 43.31,89.97 43.31,99.52 55.24,111.45 117.38,111.45 120.62,114.69 120.62,116.762 ; 59.828,89.972 59.828,111.378 ; 76.188,89.97 81.93,89.97 83.42,91.46 83.42,111.41

## Text inside footprints (layer, text, board x,y; h text height)
DS1: Top Overlay "6" at 123.825,88.59 h0.8; Top Overlay "1" at 106.477,88.64 h0.8
M1: Bottom Overlay "220 to 5V 700mA" at 187.378,109.085 h2 r90